# Altium PCB PCB_FT232H.PcbDoc
Units mil, origin at the board's own origin, x right, y up, seen from the top; angles counter-clockwise.
Board outline 1182.5 x 536.5 mil, 4 copper layers (Top Layer, GND, PWR, Bottom Layer), stack 39.383 mil thick; 38 components, 29 nets, 136 pads, 152 vias.
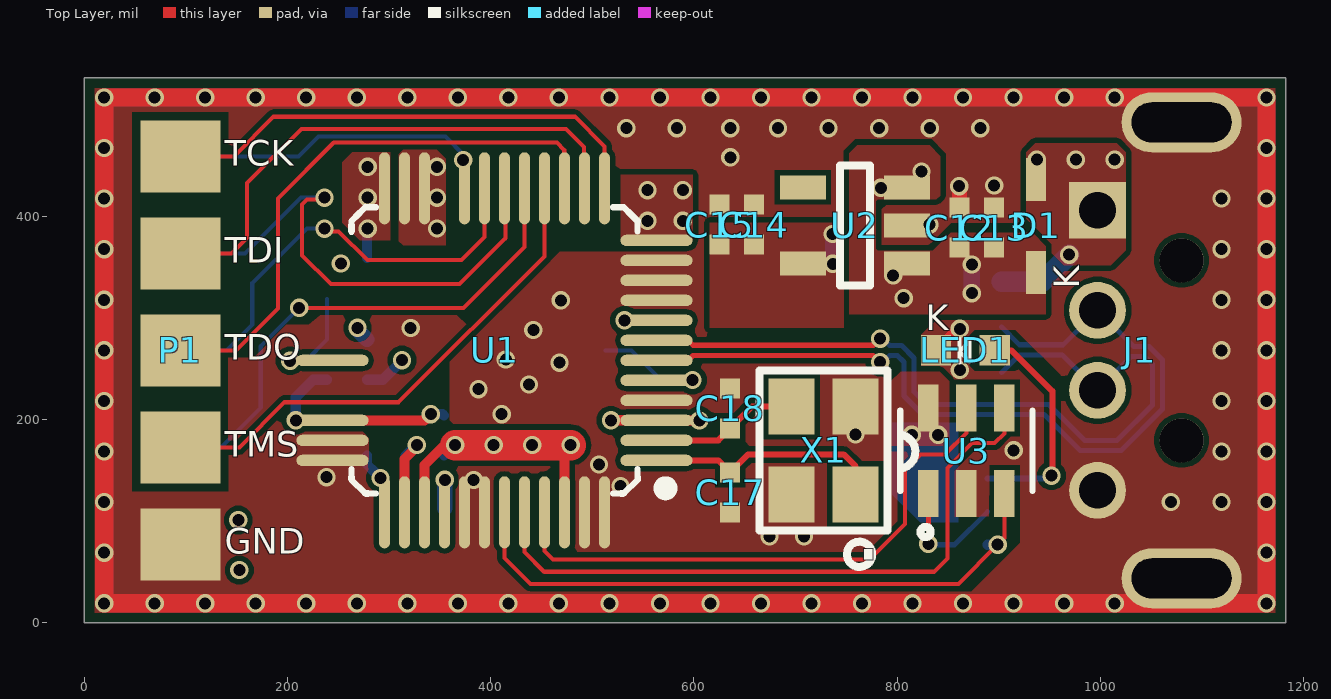
[diagram p0: Top Layer view]
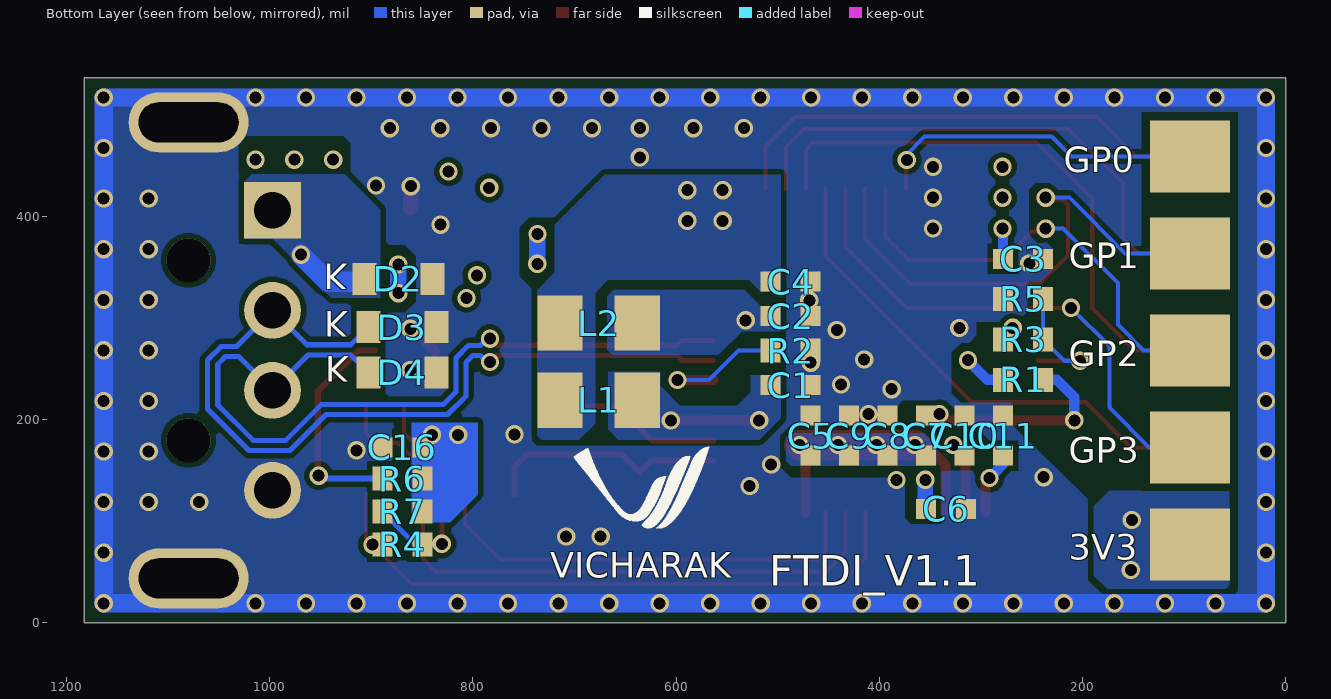
[diagram p1: Bottom Layer view, seen from below]
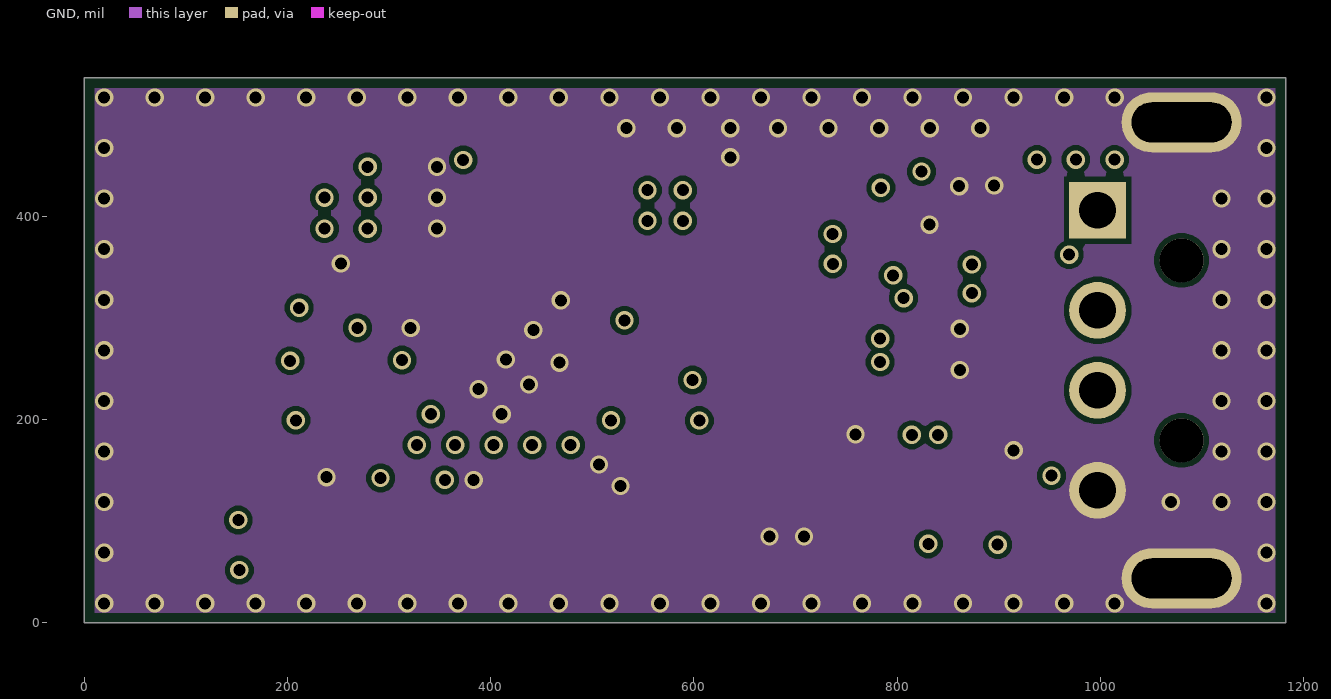
[diagram p2: GND]
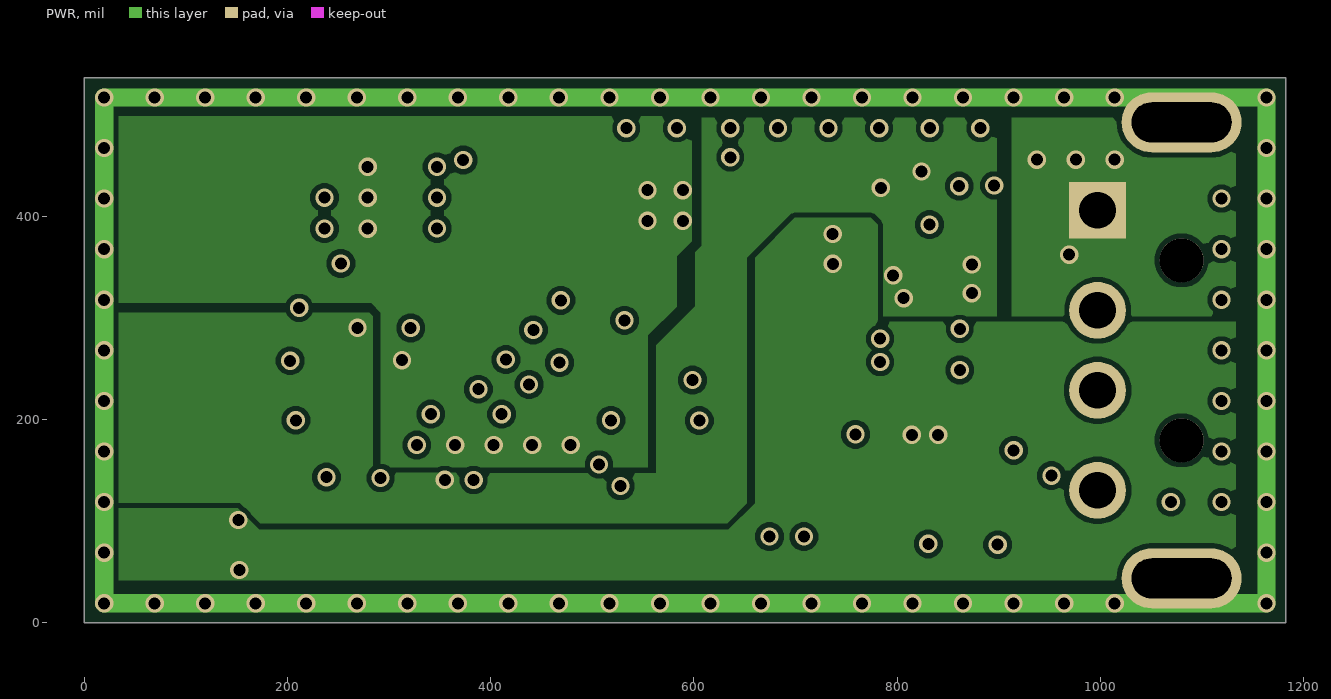
[diagram p3: PWR]
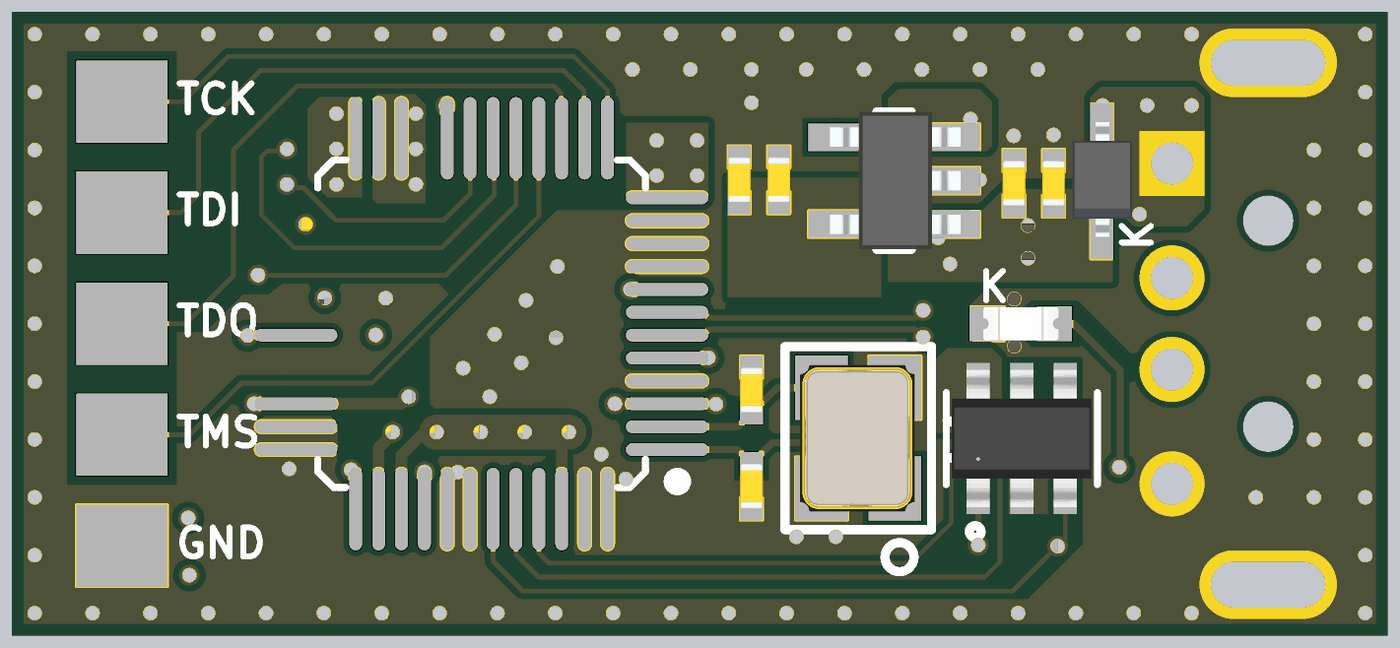
[diagram p4: 3D render of the assembled board from above, using the file's embedded part models]
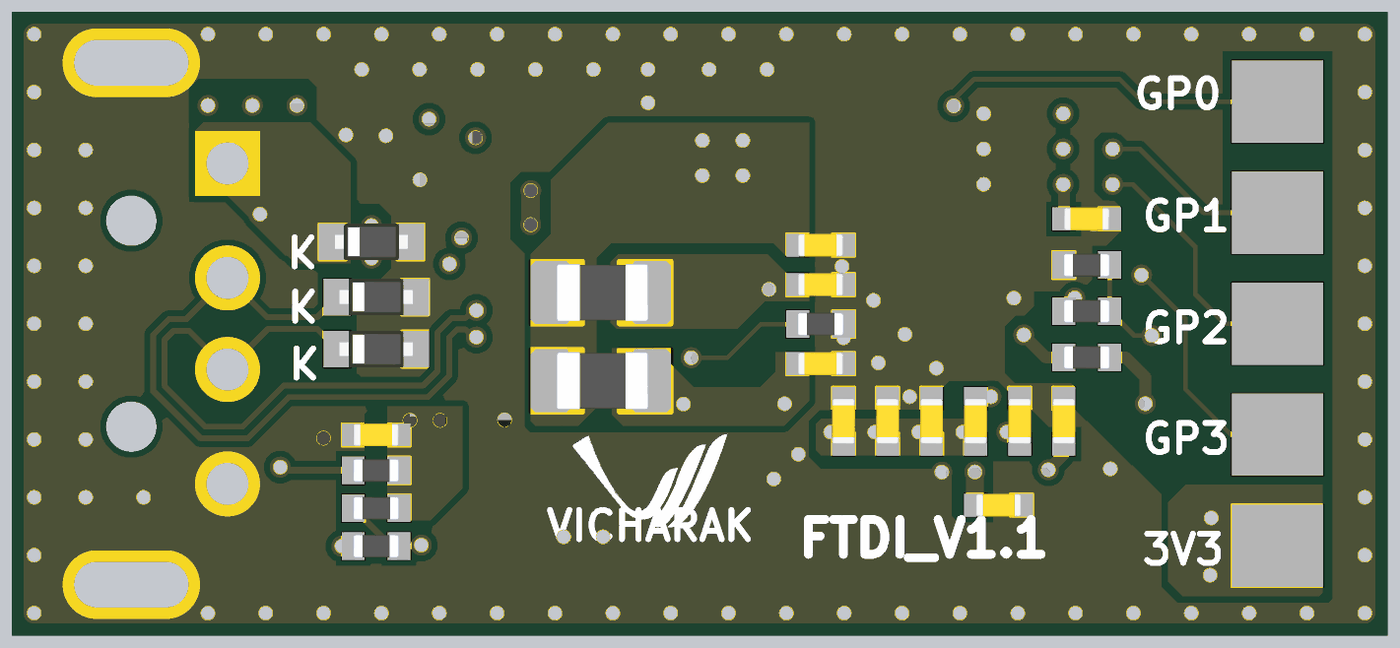
[diagram p5: 3D render of the assembled board from below, using the file's embedded part models]

## Layer stack, top to bottom
Top Solder: solder mask 1, SM-001, Dk 4
Top Layer: signal copper 1.4
Dielectric 2: prepreg 3.9134, PP-006, Dk 4.1
GND: signal copper 0.5984
Dielectric 1: dielectric 27.5591, FR-4, Dk 4.8
PWR: signal copper 0.5984
Dielectric 3: prepreg 3.9134, PP-006, Dk 4.1
Bottom Layer: signal copper 1.4
Bottom Solder: solder mask 1, SM-001, Dk 4

## Board outline
0,0 1182.5,0 1182.5,536.5 0,536.5

## Design rules (kind name [scope] priority, off if disabled: settings)
BoardOutlineClearance [All] p1: gap=10 ignorepadtopadclearanceinfootprint=FALSE except(0: Arc-SplitContinuation Track-SplitContinuation SMDPad-SplitContinuation THPad-SplitContinuation Via-SplitContinuation Fill-SplitContinuation Poly-SplitContinuation Region-SplitContinuation Text-SplitContinuation)
Clearance [All] p1: gap=5 ignorepadtopadclearanceinfootprint=FALSE
ComponentClearance [All] p1: gap=6 collisioncheckmode=3 verticalgap=10 showdistances=FALSE
DiffPairsRouting [All] p1: maxlimit=5 minlimit=5 mostfreqgap=5 toplayer_minwidth=4 toplayer_maxwidth=5 toplayer_prefwidth=5 midlayer1_minwidth=4 midlayer1_maxwidth=5 midlayer1_prefwidth=5 midlayer2_minwidth=4 midlayer2_maxwidth=5 midlayer2_prefwidth=5 bottomlayer_minwidth=4 bottomlayer_maxwidth=5 bottomlayer_prefwidth=5 maxuncoupledlength=500
HoleSize [All] p1: absolutevalues=TRUE maxlimit=100 minlimit=0.04 maxpercent=80.000 minpercent=20.000
MinimumSolderMaskSliver [All] p1: minsoldermaskwidth=0
NetAntennae [All] p1: netantennaetolerance=10
PolygonConnect [All] p1: connectstyle=Direct reliefconductorwidth=10 reliefentries=4 polygonreliefangle="90 Angle" airgapwidth=10
RoutingVias [All] p1: holewidth=11.81 width=17.99 viastyle="Through Hole" minholewidth=11.81 minwidth=17.99 maxholewidth=11.81 maxwidth=17.99
SilkToSilkClearance [All] p1: silktosilkclearance=0
SilkToSolderMaskClearance [IsPad] p1: minsilkscreentomaskgap=0 clearancetoexposedcopper=TRUE
SolderMaskExpansion [All] p1: expansion=1 istentingtop=FALSE
UnRoutedNet [All] p1: checkbadconnections=TRUE
Width [All] p1: maxlimit=200 minlimit=4 preferedwidth=6 midlayer1_prefwidth=5 midlayer2_prefwidth=5 minimp=50.000000 maximp=50.000000 favimp=50.000000
22 further rules are at their usual default settings.

## Classes and differential pairs
net class DIFF90: USB_N USB_P
differential pair USB: +USB_P -USB_N

## Components (designator, comment, footprint, x,y, rotation, side; value= is the part's Value field where it differs from the comment)
C1 "" CAPC0402 487.32,233.96 r0 bottom value=100nF
C2 "" CAPC0402 487.32,301.92 r0 bottom value=100nF
C3 "" CAPC0402 258.59,358.43 r180 bottom value=100nF
C4 "" CAPC0402 487.32,335.89 r180 bottom value=100nF
C5 "" CAPC0402 467.64,184.4 r90 bottom value=100nF
C6 "" CAPC0402 334.34,112.25 r0 bottom value=100nF
C7 "" CAPC0402 354.02,184.4 r270 bottom value=10nF
C8 "" CAPC0402 391.89,184.4 r270 bottom value=4.7uF
C9 "" CAPC0402 429.77,184.4 r270 bottom value=100nF
C10 "" CAPC0402 316.15,184.4 r270 bottom value=100nF
C11 "" CAPC0402 278.28,184.4 r270 bottom value=100nF
C12 "" CAPC0402 861.43,389.04 r270 top value=4.7uF
C13 "" CAPC0402 895.48,389.04 r270 top value=100nF
C14 "" CAPC0402 659.25,392.04 r270 top value=100nF
C15 "" CAPC0402 625.2,392.04 r270 top value=4.7uF
C16 "" CAPC0402 869.45,172.7 r180 bottom value=100nF
C17 "" CAPC0402 635.73,128.54 r90 top value=22pF
C18 "" CAPC0402 635.73,211.21 r270 top value=22pF
D1 "" BAT760-7 936.91,390.7 r90 top
D2 "" SOD523 873.48,338.66 r90 bottom
D3 "" SOD523 869.45,291.19 r90 bottom
D4 "" SOD523 869.45,246.44 r90 bottom
J1 "" MOLEX_48037-0001_0 1038.61,268.3 r90 top locked
L1 "" "FERRITE BEAD 600R 0.5A" 676.2,219.21 r180 bottom
L2 "" "FERRITE BEAD 600R 0.5A" 676.2,295.02 r180 bottom
LED1 "" LED_0603 867.27,268.3 r180 top
P1 "" "10 PIN SMD" 94.48,268.3 r90 top
R1 "" RESC0402 258.59,239.33 r180 bottom value=10k
R2 "" RESC0402 487.32,267.94 r180 bottom value=12k
R3 "" RESC0402 258.59,279.03 r0 bottom value=10K
R4 "" RESC0402 869.45,76.98 r180 bottom value=2K
R5 "" RESC0402 258.59,318.73 r180 bottom value=20K
R6 "" RESC0402 869.45,142.11 r180 bottom value=2K
R7 "" RESC0402 869.45,109.55 r0 bottom value=10k
U1 "" "LQFP-48_7X7X05P__  FT232HL-REEL" 403.72,268.3 r180 top locked
U2 "" SOT25 758.35,391.31 r180 top
U3 "" SOT-23-6 868.07,169.51 r90 top
X1 "" CRYSTAL_3225 727.54,169.88 r90 top

## Footprints (in the part's own frame and the unit in brackets; to place one, negate y for a bottom-side part, rotate by r counter-clockwise, add the part's x,y. Pads: shape width x height; smd on the part's side, far side on the other; paste and mask are expansions set on the pad)
"10 PIN SMD" [mm]
  rect 1.8x2 smd: 1(-4.85,0) 2(-2.425,0) 3(0,0) 4(2.425,0) 5(4.85,0)
  rect 1.8x2 smd far side: 6(4.85,0) 7(2.425,0) 8(0,0) 9(-2.425,0) 10(-4.85,0)
BAT760-7 [mm]
  rect 1.075x0.5 smd: 1(-1.162,0) 2(1.162,0)
  body extent -1.21,-0.66 1.29,0.64, height 1.2
CAPC0402 [mm]
  rect 0.5x0.5 smd: 1(-0.5,0) 2(0.5,0)
  body extent -0.5,-0.25 0.5,0.25, height 0.56
CRYSTAL_3225 [mm] "3225 pack"
  rect 1.4x1.15 smd: 1(-1.1,-0.8) 2(1.1,-0.8) 3(1.1,0.8) 4(-1.1,0.8)
  silkscreen extent -2.92,-1.6 2,1.6, body extent -1.6,-1.23 1.6,1.27, height 0.6
"FERRITE BEAD 600R 0.5A" [mil] "Ferrite Beads 600 OHM 25% 0.5A"
  rect 44.59x54.21 smd paste-3937.01 mask+2: 1(-38.05,0) 2(38.04,0)
  body extent -38,-25 41,25, height 41
LED_0603 [mil]
  rect 30x30 smd: A(-29.02,0) K(29.02,0)
  silkscreen extent -4,-11 6,12, body extent -32,-14 32,14, height 25
"LQFP-48_7X7X05P__  FT232HL-REEL" [mm]
  oval 1.8x0.28 smd: 1(-4.05,2.75) 2(-4.05,2.25) 3(-4.05,1.75) 4(-4.05,1.25) 5(-4.05,0.75) 6(-4.05,0.25) 7(-4.05,-0.25) 8(-4.05,-0.75) 9(-4.05,-1.25) 10(-4.05,-1.75) 11(-4.05,-2.25) 12(-4.05,-2.75) 31(4.05,0.25) 34(4.05,1.75) 35(4.05,2.25) 36(4.05,2.75)
  oval 0.28x1.8 smd: 13(-2.75,-4.05) 14(-2.25,-4.05) 15(-1.75,-4.05) 16(-1.25,-4.05) 17(-0.75,-4.05) 18(-0.25,-4.05) 19(0.25,-4.05) 20(0.75,-4.05) 22(1.75,-4.05) 23(2.25,-4.05) 24(2.75,-4.05) 37(2.75,4.05) 38(2.25,4.05) 39(1.75,4.05) 40(1.25,4.05) 41(0.75,4.05) 42(0.25,4.05) 43(-0.25,4.05) 44(-0.75,4.05) 45(-1.25,4.05) 46(-1.75,4.05) 47(-2.25,4.05) 48(-2.75,4.05)
  silkscreen extent -4.42,-3.58 3.58,3.6, body extent -4.5,-4.5 4.5,4.5, height 1.45
MOLEX_48037-0001_0 [mm]
  rect 1.42x1.42 hole 0.92 paste-1000 mask+0: 1(3.5,1.05)
  round 1.42 hole 0.92 paste-1000 mask+0: 2(1,1.05) 3(-1,1.05) 4(-3.5,1.05)
  oval 1.5x3 hole 1 slot 2.5 at 90 deg paste-1000 mask+0: 5(-5.7,-1.05) 6(5.7,-1.05)
  round 1.1 hole 1.1 unplated paste-1000 mask+0: ""(-2.25,-1.05) ""(2.25,-1.05)
  body extent -6.3,-18.76 6.3,1.16, height 3
RESC0402 [mm]
  rect 0.5x0.6 smd: 1(0.5,0) 2(-0.5,0)
  body extent -0.5,-0.25 0.5,0.25, height 0.4
SOD523 [mm]
  rect 0.8x0.6 smd: 1(0,0.85) 2(0,-0.85)
  body extent -0.4,-0.8 0.4,0.8, height 0.7
SOT25 [mm]
  rect 1.15x0.6 smd: 1(-1.3,0.95) 2(-1.3,0) 3(-1.3,-0.95) 4(1.3,-0.95) 5(1.3,0.95)
  silkscreen extent -0.38,-1.5 0.38,1.5, body extent -1.45,-1.5 1.4,1.5, height 1.3
SOT-23-6 [mil]
  rect 46x20 smd paste+0 mask+0: 1(-42,37.4) 2(-42,0) 3(-42,-37.4) 4(42,-37.4) 5(42,0) 6(42,37.4)
  silkscreen extent -85,-65 40,65, body extent -59,-60 59,60, height 57

## Part data
C1 C2 C3 C4 C5 C6 C9 C10 C11 C13 C14 C16: library part Capacitor, "CAP CER 100nF 50V X7R 0402", Case/Package=0402, Dielectric=X7R, Voltage=50V
C7: library part Capacitor, "CAP CER 10nF 25V X7R 0402", Case/Package=0402, Dielectric=X7R, Voltage=25V
C8 C12 C15: library part Capacitor, "CAP CER 4.7uF 16V X5R 0402", Case/Package=0402, Dielectric=X5R, Voltage=16V
C17 C18: library part Capacitor, "CAP CER 22pF 50V 0402", Case/Package=0402, Voltage=50V
D1: library part B5819WS, "DIODE SCHOTTKY 40V 1A SOD323", Case/Package=SOD-323, Manufacturer Part Number=B5819WS
D2 D3 D4: library part ESD9X5.0ST5G, "12.3V Clamp 8.7A (8/20µs) Ipp Tvs Diode Surface Mount SOD-523", Case/Package=SOD-523, Manufacturer Part Number=LESD5Z5.0CT1G, ComponentLink1Description=https://datasheet.ciiva.com/30478/0900766b812769b5-30478676.pdf?src-supplier=RSComponents, ComponentLink1URL=https://datasheet.ciiva.com/30478/0900766b812769b5-30478676.pdf?src-supplier=RSComponents, ComponentLink2Description=https://datasheet.ciiva.com/25958/esd9x3-3st5g-d-25958458.pdf?src-supplier=Avnet+Europe, ComponentLink2URL=https://datasheet.ciiva.com/25958/esd9x3-3st5g-d-25958458.pdf?src-supplier=Avnet+Europe, ComponentLink3Description=https://datasheet.ciiva.com/1219/1748783-1219324.pdf?src-supplier=Newark, ComponentLink3URL=https://datasheet.ciiva.com/1219/1748783-1219324.pdf?src-supplier=Newark, ComponentLink4Description=https://datasheet.ciiva.com/3304/esd9x3-3st5g-d-3304012.pdf?src-supplier=Avnet, ComponentLink4URL=https://datasheet.ciiva.com/3304/esd9x3-3st5g-d-3304012.pdf?src-supplier=Avnet, ComponentLink5Description=https://datasheet.ciiva.com/339/esd9x3-3st5g-d-339709.pdf?src-supplier=Digi-Key, ComponentLink5URL=https://datasheet.ciiva.com/339/esd9x3-3st5g-d-339709.pdf?src-supplier=Digi-Key, ComponentLink6Description=https://datasheet.ciiva.com/16215/esd9x3-3st5g-d-16215149.pdf?src-supplier=Future+Electronics, ComponentLink6URL=https://datasheet.ciiva.com/16215/esd9x3-3st5g-d-16215149.pdf?src-supplier=Future+Electronics, ComponentLink7Description=https://datasheet.ciiva.com/339/esd9x3-3st5g-d-339710.pdf?src-supplier=Digi-Key, ComponentLink7URL=https://datasheet.ciiva.com/339/esd9x3-3st5g-d-339710.pdf?src-supplier=Digi-Key, ComponentLink8Description=https://datasheet.ciiva.com/339/esd9x3-3st5g-d-339711.pdf?src-supplier=Digi-Key, ComponentLink8URL=https://datasheet.ciiva.com/339/esd9x3-3st5g-d-339711.pdf?src-supplier=Digi-Key
J1: library part "USB MALE", "USB A-type Plug Male PCB R/A", Case/Package=TH, Manufacturer Part Number="USB Type A male"
L1 L2: library part "Ferrite Bead", "Ferrite Beads 600 OHM 25% 2A", Case/Package=0805, Manufacturer Part Number=UPZ2012E601-2R0TF
LED1: library part LED, "RED LED 0603", Case/Package=0603
P1: library part "Header 10", "Header, 10-Pin", Case/Package="Re-released for DXP Platform.", Manufacturer Part Number=17-Jul-2002
R1 R3: library part Res1, "Thick Film Resistor -  10Kohm, 1%, 0402", Case/Package=0402
R2: library part Res1, "Thick Film Resistor -  12Kohm, 1%, 0402", Case/Package=0402, ComponentLink1Description=http://uk.rs-online.com/webdocs/0d98/0900766b80d98824.pdf?src-supplier=RSComponents, ComponentLink1URL=http://uk.rs-online.com/webdocs/0d98/0900766b80d98824.pdf?src-supplier=RSComponents, ComponentLink2Description=http://www.vishay.com/docs/20035/dcrcwe3.pdf?src-supplier=Digi-Key, ComponentLink2URL=http://www.vishay.com/docs/20035/dcrcwe3.pdf?src-supplier=Digi-Key, ComponentLink3Description=http://www.farnell.com/datasheets/2045673.pdf?src-supplier=Element14, ComponentLink3URL=http://www.farnell.com/datasheets/2045673.pdf?src-supplier=Element14, ComponentLink4Description=http://www.vishay.com/docs/20035/dcrcwe3.pdf?src-supplier=Avnet, ComponentLink4URL=http://www.vishay.com/docs/20035/dcrcwe3.pdf?src-supplier=Avnet, ComponentLink5Description=https://www.distrelec.biz/Web/Downloads/a_/en/flD-CRCW-e3_data_en.pdf?mime=application%2Fpdf&src-supplier=Distrelec, ComponentLink5URL=https://www.distrelec.biz/Web/Downloads/a_/en/flD-CRCW-e3_data_en.pdf?mime=application%2Fpdf&src-supplier=Distrelec, ComponentLink6Description=http://www.vishay.com/docs/20035/dcrcwe3.pdf?src-supplier=Mouser, ComponentLink6URL=http://www.vishay.com/docs/20035/dcrcwe3.pdf?src-supplier=Mouser, ComponentLink7Description=http://www.farnell.com/datasheets/2111203.pdf?src-supplier=Element14, ComponentLink7URL=http://www.farnell.com/datasheets/2111203.pdf?src-supplier=Element14, ComponentLink8Description=http://www.vishay.com/docs/20035/dcrcwe3.pdf?src-supplier=Future+Electronics, ComponentLink8URL=http://www.vishay.com/docs/20035/dcrcwe3.pdf?src-supplier=Future+Electronics, ComponentLink9Description=https://www.te.com/commerce/DocumentDelivery/DDEController?Action=srchrtrv&amp;DocNm=1773204-3&amp;DocType=DS&amp;DocLang=English&src-supplier=Digi-Key, ComponentLink9URL=https://www.te.com/commerce/DocumentDelivery/DDEController?Action=srchrtrv&amp;DocNm=1773204-3&amp;DocType=DS&amp;DocLang=English&src-supplier=Digi-Key, ComponentLink10Description=https://4donline.ihs.com/images/VipMasterIC/IC/TYEL/TYEL-S-A0004929575/TYEL-S-A0004929575-1.pdf?hkey=52A5661711E402568146F3353EA87419&src-supplier=Farnell, ComponentLink10URL=https://4donline.ihs.com/images/VipMasterIC/IC/TYEL/TYEL-S-A0004929575/TYEL-S-A0004929575-1.pdf?hkey=52A5661711E402568146F3353EA87419&src-supplier=Farnell, ComponentLink11Description=https://4donline.ihs.com/images/VipMasterIC/IC/TYEL/TYEL-S-A0004929575/TYEL-S-A0004929575-1.pdf?hkey=52A5661711E402568146F3353EA87419&src-supplier=Newark, ComponentLink11URL=https://4donline.ihs.com/images/VipMasterIC/IC/TYEL/TYEL-S-A0004929575/TYEL-S-A0004929575-1.pdf?hkey=52A5661711E402568146F3353EA87419&src-supplier=Newark
R4 R6: library part Res1, "Thick Film Resistor -  2Kohm, 1%, 0402", Case/Package=0402
R5: library part Res1, "Thick Film Resistor -  20Kohm, 1%, 0402", Case/Package=0402
R7: library part Res, "Thick Film Resistor -  10Kohm, 1%, 0402", Case/Package=0402
U1: library part FT232HL, "USB Interface IC USB HS to UART/FIFO SPI/JTAG/I2C LQFP-48", Case/Package=LQFP-48_7x7x05P, Manufacturer Part Number=FT232HL-REEL
U2: library part LDO_5V_3V, "LDO Voltage Regulators 600mA CMOS LDO 50mA 3.3V 250mV", Case/Package=SOT25, Manufacturer Part Number=AP2112K-3.3TRG1, ComponentLink1Description=http://www.diodes.com/datasheets/AP2112.pdf?src-supplier=Avnet, ComponentLink1URL=http://www.diodes.com/datasheets/AP2112.pdf?src-supplier=Avnet, ComponentLink2Description=https://www.diodes.com/assets/Datasheets/AP2112.pdf?src-supplier=Digi-Key, ComponentLink2URL=https://www.diodes.com/assets/Datasheets/AP2112.pdf?src-supplier=Digi-Key
U3: library part 93LC56BT-I/OT, "MICROCHIP - 93LC56BT-I/OT. - 2K, 128 X 16, SERIAL EE, IND ROHS COMPLIANT: YES", Case/Package=SOT-23-6, Frequency=2MHz, Manufacturer=Microchip, Max Operating Temperature=85°C, Max Supply Voltage=5.5V, Min Operating Temperature=-40°C, Min Supply Voltage=2.5V, Nominal Supply Current=2mA, Package Quantity=3000, Supplier Part Number 1=93LC56BT-I/OTCT-ND, Access Time=250ns, Category=EEPROM, ComponentLink1Description=https://datasheet.ciiva.com/48496/jp013939-48496476.pdf?src-supplier=Avnet, ComponentLink1URL=https://datasheet.ciiva.com/48496/jp013939-48496476.pdf?src-supplier=Avnet, ComponentLink2Description=https://datasheet.ciiva.com/16216/filehandler-aspxddocname-en013939-16216574.pdf?src-supplier=Future+Electronics, ComponentLink2URL=https://datasheet.ciiva.com/16216/filehandler-aspxddocname-en013939-16216574.pdf?src-supplier=Future+Electronics, ComponentLink3Description=https://datasheet.ciiva.com/3185/jp013939-3185519.pdf?src-supplier=Avnet, ComponentLink3URL=https://datasheet.ciiva.com/3185/jp013939-3185519.pdf?src-supplier=Avnet, ComponentLink4Description=https://datasheet.ciiva.com/16622/jp013939-16622127.pdf?src-supplier=Avnet+Europe, ComponentLink4URL=https://datasheet.ciiva.com/16622/jp013939-16622127.pdf?src-supplier=Avnet+Europe, Contact Plating=Tin,Matte, Density=2Kb, Height=1.3mm, Interface=Serial, Lead Free="Lead Free", Length=3.1mm, Manufacturer Part Number=93LC56BT-I/OT, Max Frequency=2MHz, Memory Size=2Kb, Memory Type=EEPROM, Mount="Surface Mount", Number of Pins=6, Packaging="Tape and Reel", Pricing 1="1=0.23000, 25=0.22040, 100=0.21000 (USD)", Radiation Hardening=No, REACH SVHC="No SVHC", RoHS=Yes, Stock 1=10933, Supplier 1=Digi-Key, Width=1.8mm
X1: library part CRYSTAL_1_1, "CRYSTAL 12.0000MHZ 10PF SMD", Case/Package=SMD-3225, Frequency=12MHz, Manufacturer Part Number=ECS-120-10-33B-CKM-TR

## Via types
v1: diameter 17.99, hole 11.81, Top Layer to Bottom Layer, tented both sides, 152 vias

## Nets (pads, with @x,y where several pads share a name; then routed paths per layer and width w, separated by ;. In a path a pad name is that pad's centre, name@x,y a point inside that pad or via, vN(x,y) a via of type N, cw(c..) or ccw(c..) an arc to the next point about the centre after c; other vN are vias at no path point)
3V3: C14.2 C15.2 C16.2 P1.10 R6.1 R7.2 U2.5 U3.6 | length 29.4
  Bottom Layer w16: v1(736.51,382.78) 736.75,382.54 v1@736.75,353.48
  other v1: 152.5,52 151.5,101.22 814.48,185.15 840.4,185.15 736.63,353.48
GND: C1.1 C2.1 C3.2 C4.2 C5.2 C6.1 C8.1 C9.1 C10.1 C11.1 C12.1 C13.1 C14.1 C15.1 C16.1 C17.1 C18.1 D2.2 D3.2 D4.2 J1.4 J1.5 J1.6 LED1.K P1.1 R2.1 R5.2 U1.4 U1.9 U1.10 U1.11 U1.22 U1.23 U1.35 U1.36 U1.41 U1.42 U1.47 U1.48 U2.2 U3.2 X1.2 X1.4 | length 9908.3
  Top Layer w10: C18.1 C18.1@635.73,230.99 ; LED1.K@837.65,267.1 837.05,267.1 LED1.K 859.46,289.51 v1(861.64,289.51)
  Top Layer w15: v1(861.1,429.93) 861.27,429.77 861.27,408.89 C12.1
  Top Layer w18: v1@1163.29,19.37 v1(1014.09,19.37) v1(964.36,19.37) v1(914.63,19.37) v1(864.9,19.37) v1(815.17,19.37) v1(765.44,19.37) v1(715.71,19.37) v1(665.98,19.37) v1(616.25,19.37) v1(566.52,19.37) v1(516.79,19.37) v1(467.06,19.37) v1(417.33,19.37) v1(367.6,19.37) v1(317.87,19.37) v1(268.13,19.37) v1(218.4,19.37) v1(168.67,19.37) v1(118.94,19.37) v1(69.21,19.37) v1(19.48,19.37) v1(19.48,69.15) v1(19.48,118.94) v1(19.48,168.73) v1(19.48,218.52) v1(19.48,268.3) v1(19.48,318.09) v1(19.48,367.88) v1(19.48,417.66) v1(19.48,467.45) v1(19.48,517.24) v1(69.21,517.24) v1(118.94,517.24) v1(168.67,517.24) v1(218.4,517.24) v1(268.13,517.24) v1(317.87,517.24) v1(367.6,517.24) v1(417.33,517.24) v1(467.06,517.24) v1(516.79,517.24) v1(566.52,517.24) v1(616.25,517.24) v1(665.98,517.24) v1(715.71,517.24) v1(765.44,517.24) v1(815.17,517.24) v1(864.9,517.24) v1(914.63,517.24) v1(964.36,517.24) v1(1014.09,517.24) v1@1163.29,517.24 ; v1(1163.46,19.37) v1(1163.46,69.15) v1(1163.46,118.94) v1(1163.46,168.73) v1(1163.46,218.52) v1(1163.46,268.3) v1(1163.46,318.09) v1(1163.46,367.88) v1(1163.46,417.66) v1(1163.46,467.45) v1(1163.46,517.24)
  PWR w18: v1@1163.29,19.37 v1(1014.09,19.37) v1(964.36,19.37) v1(914.63,19.37) v1(864.9,19.37) v1(815.17,19.37) v1(765.44,19.37) v1(715.71,19.37) v1(665.98,19.37) v1(616.25,19.37) v1(566.52,19.37) v1(516.79,19.37) v1(467.06,19.37) v1(417.33,19.37) v1(367.6,19.37) v1(317.87,19.37) v1(268.13,19.37) v1(218.4,19.37) v1(168.67,19.37) v1(118.94,19.37) v1(69.21,19.37) v1(19.48,19.37) v1(19.48,69.15) v1(19.48,118.94) v1(19.48,168.73) v1(19.48,218.52) v1(19.48,268.3) v1(19.48,318.09) v1(19.48,367.88) v1(19.48,417.66) v1(19.48,467.45) v1(19.48,517.24) v1(69.21,517.24) v1(118.94,517.24) v1(168.67,517.24) v1(218.4,517.24) v1(268.13,517.24) v1(317.87,517.24) v1(367.6,517.24) v1(417.33,517.24) v1(467.06,517.24) v1(516.79,517.24) v1(566.52,517.24) v1(616.25,517.24) v1(665.98,517.24) v1(715.71,517.24) v1(765.44,517.24) v1(815.17,517.24) v1(864.9,517.24) v1(914.63,517.24) v1(964.36,517.24) v1(1014.09,517.24) v1@1163.29,517.24 ; v1(1163.46,19.37) v1(1163.46,69.15) v1(1163.46,118.94) v1(1163.46,168.73) v1(1163.46,218.52) v1(1163.46,268.3) v1(1163.46,318.09) v1(1163.46,367.88) v1(1163.46,417.66) v1(1163.46,467.45) v1(1163.46,517.24)
  Bottom Layer w10: v1@859.95,291.19 v1(861.64,289.51)
  Bottom Layer w18: v1@1163.29,19.37 v1(1014.09,19.37) v1(964.36,19.37) v1(914.63,19.37) v1(864.9,19.37) v1(815.17,19.37) v1(765.44,19.37) v1(715.71,19.37) v1(665.98,19.37) v1(616.25,19.37) v1(566.52,19.37) v1(516.79,19.37) v1(467.06,19.37) v1(417.33,19.37) v1(367.6,19.37) v1(317.87,19.37) v1(268.13,19.37) v1(218.4,19.37) v1(168.67,19.37) v1(118.94,19.37) v1(69.21,19.37) v1(19.48,19.37) v1(19.48,69.15) v1(19.48,118.94) v1(19.48,168.73) v1(19.48,218.52) v1(19.48,268.3) v1(19.48,318.09) v1(19.48,367.88) v1(19.48,417.66) v1(19.48,467.45) v1(19.48,517.24) v1(69.21,517.24) v1(118.94,517.24) v1(168.67,517.24) v1(218.4,517.24) v1(268.13,517.24) v1(317.87,517.24) v1(367.6,517.24) v1(417.33,517.24) v1(467.06,517.24) v1(516.79,517.24) v1(566.52,517.24) v1(616.25,517.24) v1(665.98,517.24) v1(715.71,517.24) v1(765.44,517.24) v1(815.17,517.24) v1(864.9,517.24) v1(914.63,517.24) v1(964.36,517.24) v1(1014.09,517.24) v1@1163.29,517.24 ; v1(1163.46,19.37) v1(1163.46,69.15) v1(1163.46,118.94) v1(1163.46,168.73) v1(1163.46,218.52) v1(1163.46,268.3) v1(1163.46,318.09) v1(1163.46,367.88) v1(1163.46,417.66) v1(1163.46,467.45) v1(1163.46,517.24)
  other v1: 674.36,84.99 708.25,84.99 1069.41,118.94 1119.2,118.94 527.68,134.81 383.16,140.64 238.25,143.48 506.5,156.02 1119.2,168.73 914.72,169.88 759.04,185.62 410.73,205.49 1119.2,218.52 387.85,230.03 437.76,234.65 861.64,248.9 467.64,256.13 414.88,259.19 1119.2,268.3 441.91,288.35 321.25,290.24 468.94,317.51 1119.2,318.09 252.41,353.79 1119.2,367.88 347.18,388.19 831.88,392.04 1119.2,417.66 347.18,418.58 895.48,430.65 347.18,448.96 635.74,458.32 533.38,486.92 583.17,486.92 635.74,486.92 682.74,486.92 732.53,486.92 782.32,486.92 832.1,486.92 881.89,486.92
GPIOL0: P1.9 U1.17 | length 513.7
  Top Layer w4: v1(211.45,310.16) 211.66,309.95 373.04,309.95 433.25,370.15 U1.17
  Bottom Layer w4: P1.9@94.51,172.86 134.62,172.86 173.64,211.88 173.64,272.36 v1(211.45,310.16)
GPIOL1: P1.7 U1.18 | length 519.7
  Top Layer w4: v1@236.35,417.77 235.47,416.89 219.35,416.89 214.29,411.83 214.29,361.85 242.72,333.43 369.34,333.43 414.57,378.65 414.57,426.75 U1.18
  Bottom Layer w4: P1.7 158.25,363.77 213.06,418.58 235.54,418.58 v1@236.35,417.77
  other v1: 236.35,418.58
GPIOL2: P1.8 U1.19 | length 442.8
  Top Layer w4: v1@236.49,388.1 239.17,385.42 250.3,385.42 278.58,357.15 371.22,357.15 393.88,379.8 U1.19
  Bottom Layer w4: P1.8 139.83,268.3 165.29,293.76 165.29,334.37 219.02,388.1 v1(236.35,388.1)
GPIOL3: P1.6 U1.20 | length 329
  Top Layer w4: U1.20@369.92,456.67 U1.20@370.94,455.65 ; U1.20@373.92,456.67 373.92,428.02 U1.20
  Bottom Layer w4: P1.6 210.98,459.25 230.33,478.6 355.38,478.6 373.92,460.06 v1@373.92,456.67
  other v1: 372.92,455.67
NetC1_2: C1.2 L1.2 U1.3 | length 91.9
  Top Layer w4: U1.3@563.12,199.46 U1.3 ; v1@607.18,199.4 v1@608.26,200.48
  Top Layer w10: v1@516.81,199.46 v1(518.31,199.46) U1.3@563.12,199.46 ; U1.3 v1@607.18,199.4
  other v1: 605.26,199.17
NetC2_2: C2.2 L2.2 U1.8
  other v1: 531.61,297.83
NetC7_1: C7.1 R1.1 U1.34 | length 209.5
  Top Layer w10: v1(208.16,199.49) 208.25,199.4 U1.34 334.89,199.4 v1(340.97,205.49)
  Bottom Layer w10: v1(208.16,199.49) 208.16,222.18 225.31,239.33 R1.1 ; v1(340.97,205.49) 352.62,205.49 C7.1
NetC10_2: C10.2 U1.38 | length 79.5
  Top Layer w10: U1.38 315.14,161.41 v1@325.49,171.76
  Bottom Layer w10: C10.2 323.19,171.76 C10.2@325.49,171.76
  other v1: 327.19,175.06
NetC11_2: C11.2 U1.37 | length 63
  Top Layer w10: v1(291.55,142.67) 295.45,138.77 U1.37
  Bottom Layer w10: C11.2 278.28,155.94 285.32,148.9 v1(291.55,142.67)
NetC17_2: C17.2 U1.1 X1.1 | length 240.5
  Top Layer w6: U1.1 623.92,160.03 C17.2 653.41,165.9 747.27,165.9 759.04,154.13 X1.1
NetC18_2: C18.2 U1.2 X1.3 | length 146.7
  Top Layer w6: U1.2 623.92,179.72 C18.2 657.38,213.18 X1.3
NetD1_2: D1.2 D2.1 J1.1 | length 77.4
  Bottom Layer w20: D2.1@902.91,335.95 942.88,335.95 v1@969.32,362.39
  other v1: 969.32,362.52 937.53,456 975.81,456 1014.09,456
NetLED1_A: LED1.A R6.2 | length 220.5
  Top Layer w6: LED1.A 912.47,268.3 952.72,228.05 952.72,145.74 v1(951.92,144.94)
  Bottom Layer w6: R6.2 949.09,142.11 v1(951.92,144.94)
NetR2_2: R2.2 U1.5 | length 133.9
  Top Layer w10: U1.5@563.44,239.04 v1@599.6,239.04
  Bottom Layer w4: R2.2@512.81,267.94 538.71,267.94 567.61,239.04 v1(598.6,239.04)
NetR3_2: R3.2 R5.1 U1.31 | length 126.6
  Top Layer w4: v1(202.58,258.05) 243.85,258.05 U1.31
  Bottom Layer w4: v1(202.58,258.05) 217.93,258.05 R3.2 R5.1
NetR4_1: R4.1 R7.1 U3.1 | length 121.9
  Top Layer w5: v1(830.67,77.9) U3.1
  Bottom Layer w5: v1(830.67,77.9) 831.59,76.98 R4.1 856.57,76.98 R7.1
NetR4_2: R4.2 U1.43 U3.3 | length 620.1
  Top Layer w4: U1.43 413.56,63.77 438.96,38.37 860.36,38.37 v1(898.97,76.98) 905.48,83.49 U3.3
  Bottom Layer w10: R4.2 v1(898.97,76.98)
NetU1_44: U1.44 U3.4 | length 652.9
  Top Layer w4: U1.44 433.25,69.78 452.67,50.37 836.24,50.37 849.37,63.5 849.37,152.63 873.85,177.11 895.93,177.11 905.48,186.65 U3.4
NetU1_45: U1.45 U3.5 | length 563.6
  Top Layer w4: U1.45 452.93,70.88 461.44,62.37 772.84,62.37 807.68,97.21 807.68,150.57 823.01,165.9 846.87,165.9 868.07,187.11 U3.5@868.07,211.14
TCK: P1.5 U1.13 | length 487
  Top Layer w4: P1.5 147.17,459.25 186.16,498.24 482.79,498.24 511.99,469.04 U1.13
TDI: P1.4 U1.14 | length 527.9
  Top Layer w4: P1.4 145.03,363.77 160.29,379.04 160.29,432.88 213.65,486.24 474.15,486.24 491.75,468.63 491.75,428.3 U1.14
TDO: P1.3 U1.15 | length 566.9
  Top Layer w4: P1.3 149.09,268.3 190.44,309.66 190.44,417.76 245.49,472.81 465.19,472.81 472.33,465.67 472.33,428.04 U1.15
TMS: P1.2 U1.16 | length 503.2
  Top Layer w4: P1.2 152.57,172.83 196.97,217.23 309.3,217.23 452.93,360.86 U1.16
USB_N: D3.1 J1.2 U1.6 | length 828.7
  Top Layer w5: U1.6 594.19,258.46 599.03,263.3 776.43,263.3 782.97,256.76 v1(783.31,256.76)
  Bottom Layer w5: v1(783.31,256.76) 786.23,256.76 792.73,263.26 800.14,263.26 806.67,256.72 806.67,223.44 824.95,205.16 944.72,205.16 980.16,169.72 1020.47,169.72 1061.23,210.48 1061.23,258.76 1047.8,272.18 1032.76,272.18 J1.2 963.41,273.81 920.29,273.81 D3.1
USB_P: D4.1 J1.3 U1.7 | length 795
  Top Layer w5: U1.7 594.19,278.14 599.03,273.3 776.86,273.3 v1(783.31,279.75)
  Bottom Layer w5: v1(783.31,279.75) 786.23,279.75 792.73,273.26 804.28,273.26 816.67,260.87 816.67,227.58 829.1,215.16 948.86,215.16 984.3,179.72 1016.33,179.72 1051.23,214.62 1051.23,254.62 1043.66,262.18 1030.52,262.18 J1.3 962.39,263.81 920.29,263.81 D4.1
VBUS: C6.2 C12.2 C13.2 D1.1 R3.1 U1.40 U2.1 U2.3 | length 72.3
  Bottom Layer w4: C6.2 C6.2@354.74,112.97
  Bottom Layer w15: v1(268.84,290.44) 268.84,288.47 R3.1 ; C6.2@354.74,112.97 v1(354.74,140.85)
  Bottom Layer w16: v1(873.48,324.6) v1(873.48,352.72)
  other v1: 806.43,319.64 796.04,342.1 783.99,428.26 823.99,444.26
VCCD: C3.1 C4.1 C5.1 C7.2 C8.2 C9.2 L1.1 L2.1 R1.2 U1.12 U1.24 U1.39 U1.46 | length 365.6
  Top Layer w10: U1.39 334.82,155.4 354.48,175.06 v1(365.07,175.06) ; U1.46 472.62,169 v1(478.68,175.06)
  Top Layer w30: v1(365.07,175.06) v1(402.94,175.06) v1(440.81,175.06) v1(478.68,175.06)
  Bottom Layer w10: C3.1@278.17,359.42 v1@278.17,386.26 ; R1.2 293.81,239.33 v1@312.67,258.19 ; C7.2 v1@364.37,175.06 ; C5.1 v1@477.98,175.06
  other v1: 312.67,258.67 278.83,388.1 554.22,395.73 589,395.73 278.83,418.58 554.22,425.91 589,425.91 278.83,448.96
pads on no net: J1. U2.4

## Polygon pours and split planes (outlines as drawn)
NetD1_2 on Top Layer "NETD1_2_L01_P003" (solid, pour order 3): 934.28,390.7 927.07,397.91 927.07,399.61 927.07,463.09 935.98,472 1016.34,472 1025.22,463.12 1025.22,366.85 1010.37,352 952.28,352 952.28,372.7
VBUS on Top Layer "VBUS_L01_P027" (solid, pour order 27): 838.7,416.9 780.72,416.9 780.72,366.45 835.1,366.45 852.65,384 934.95,384 946.5,372.45 946.5,304 753.01,304 753.01,462.11 760.82,469.92 832.11,469.92 842.5,459.53 842.5,420.69
GND on Top Layer "GND_L01_P057" (solid, remove dead copper, pour order 57): 309.63,459.96 312.87,463.2 346.97,463.2 357.16,453 357.16,372.94 355.88,371.66 313.76,371.66 309.63,375.79
GND on Top Layer "GND_L01_P058" (solid, remove dead copper, pour order 58): -4.08,538.15 1177.02,538.15 1177.02,3.15 -4.08,3.15
VCCD on Top Layer "VCCD_L01_P039" (solid, pour order 39): 300.96,463.19 263.78,463.19 253.98,453.39 253.98,394.04 271.21,376.81 300.96,376.81
3V3 on Top Layer "3V3_L01_P036" (solid, pour order 36): 615.36,290.7 615.36,393.78 738.26,393.78 747.27,384.77 747.27,290.7
VCCD on Top Layer "VCCD_L01_P008" (solid, pour order 8): 527.74,406.22 527.74,441.26 598.6,441.26 598.6,376.57 527.74,376.57
3V3 on Top Layer "3V3_L01_P006" (solid, pour order 6): 845.15,174.28 851.05,180.18 851.05,238.07 841.77,247.36 803.36,247.36 794.18,238.18 794.18,174.28
GND on Top Layer "GND_L01_P062" (solid, pour order 62): 890.48,125.55 890.48,155.51 920.43,155.51 923.39,158.46 923.39,182.27 910.52,182.27 898.76,170.51 877.35,170.51 856.51,149.67 856.51,104.9 856.9,104.51 881.56,104.51 881.95,104.9 881.95,117.03
GND on Top Layer "GND_L01_P061" (solid, pour order 61): 55.11,10.4 55.11,112.79 133.85,112.79 133.85,10.4
GND on Top Layer "GND_L01_P059" (solid, pour order 59): 609.63,486.92 609.63,407.62 615.36,401.89 669.09,401.89 676.81,409.61 676.81,455.32 698.2,476.71 698.2,498.9 621.61,498.9
GND on Top Layer "GND_L01_P048" (solid, pour order 48): 212.07,185.23 208.84,182.01 208.84,148.86 223.56,134.14 263.96,134.14 279.7,149.89 279.7,182.01 276.47,185.23 274.19,185.23
GND on Top Layer "GND_L01_P046" (solid, pour order 46): 368.68,147.72 373.32,152.36 395.65,152.36 399.39,148.62 399.39,67.4 395.76,63.77 371.53,63.77 368.68,66.62
GND on Top Layer "GND_L01_P045" (solid, pour order 45): 736.4,240.74 736.4,185.62 746.2,175.82 771.88,175.82 781.68,185.62 781.68,240.74
GND on Top Layer "GND_L01_P044" (solid, pour order 44): 662.18,126.57 633.76,126.57 625.89,118.69 625.89,92.81 647.82,70.88 732.68,70.88 732.75,70.85 732.75,84.95 718.69,99.01 718.69,154.13 662.18,154.13
GND on Top Layer "GND_L01_P043" (solid, pour order 43): 612.77,224.6 612.85,224.53 625.89,237.57 625.89,240.74 645.57,240.74 645.57,221.06 638.1,213.58 506.48,213.58 491.93,199.04 363.87,199.04 363.87,225.59 500.67,362.39 595.37,362.39 598.6,359.17 598.6,315.23 595.37,312 525.83,312 511.76,297.93 511.76,243.81 530.96,224.6
GND on Top Layer "GND_L01_P040" (solid, pour order 40): 510.67,165.54 542.51,133.71 542.51,77.71 538.22,73.42 490.02,73.42 486.79,76.65 486.79,154.52 497.81,165.54
3V3 on PWR "3V3_L03_P017" (solid, pour order 17): 794.87,41.92 1133.2,41.92 1133.2,296.44 780.72,296.44 780.72,392.04 774.19,398.57 699.24,398.57 660.22,359.56 660.22,117.95 633.93,91.66 171.91,91.66 150.78,112.79 31.84,112.79 31.84,41.92
VBUS on PWR "VBUS_L03_P019" (solid, pour order 19): 283.72,151.4 283.72,301.97 280.21,305.48 31.84,305.48 31.84,118.2 153.02,118.2 173.26,97.96 646.85,97.96 652.2,103.32 652.2,359.54 695.87,403.21 777.48,403.21 785.06,395.64 785.06,301.97 898.24,301.97 898.24,497.25 607.78,497.25 607.78,371.48 601.32,365.02 601.32,311.48 562.98,273.15 562.98,147.17 369.76,147.17 365.51,151.4
VCCD on PWR "VCCD_L03_P001" (solid, pour order 1): 282.18,315.09 291.79,305.48 291.79,285.44 291.79,153.04 554.58,153.04 554.58,283.07 582.95,311.43 582.95,360.92 597.8,375.77 597.8,498.9 31.84,498.9 31.84,315.09
NetD1_2 on PWR "NETD1_2_L03_P014" (solid, pour order 14): 1133.2,301.74 1133.2,497.25 912.89,497.25 912.89,301.74
NetD1_2 on Bottom Layer "NETD1_2_L04_P034" (solid, pour order 34): 1017.65,441.81 926.27,441.81 891.1,406.64 891.1,320.2 939.33,320.2 997.27,378.14 1025.22,378.14 1025.22,434.24
VCCD on Bottom Layer "VCCD_L04_P035" (solid, pour order 35): 516.85,326.05 528.48,337.68 667.23,337.68 679.86,325.05 679.86,196.24 695.72,180.38 732.48,180.38 736.54,184.45 736.54,328.18 719.31,345.36 719.31,392.05 670.11,441.26 497.16,441.26 497.16,337.68 497.16,326.05
NetC2_2 on Bottom Layer "NONET_L-01_P-001" (solid, pour order 32): 497.16,311.76 516.85,311.76 533.22,328.13 615.87,328.13 661.29,328.13 667.97,321.45 667.97,268.88 663.08,263.98 558.51,263.98 535.15,287.34 497.16,287.34
GND on Bottom Layer "GND_L04_P073" (solid, remove dead copper, pour order 73): 19.48,517.24 1163.46,517.24 1163.46,19.37 19.48,19.37
NetC1_2 on Bottom Layer "MM" (solid, pour order 67): 615.87,233.35 596.24,213.71 539.83,213.71 526.35,227.2 526.35,243.81 497.16,243.81 497.16,201.45 518.31,180.3 656.82,180.3 666.99,190.47 666.99,247.39 615.87,247.39
3V3 on Bottom Layer "3V3_L04_P072" (solid, pour order 72): 47.11,131.93 47.11,33.62 175.78,33.62 194.16,52 194.16,109.39 171.61,131.93 16.58,131.93
VCCD on Bottom Layer "VCCD_L04_P071" (solid, pour order 71): 344.18,175.51 355.59,186.93 486.61,186.93 492.68,180.86 492.68,160.41 487.14,154.88 344.18,154.88
GND on GND "GND_L02_P056" (solid, remove dead copper, pour order 56): 0.92,535.8 1182.02,535.8 1182.02,0.8 0.92,0.8

## Other copper
Top Layer:
  pour cut-out: 873.9,32.29 872.84,31.23 862.52,31.23 897.19,65.9 920.48,99.51 920.48,78.69 874.07,32.29
  pour cut-out: 952.28,372.7 952.28,363.94 964.54,351.67 964.49,351.62 964.49,346.59 951.9,334
  pour cut-out: 916.28,288.3 964.45,240.14 964.45,233.77
  pour cut-out: 871.27,253.32 876.28,248.3 881.28,253.3 881.28,283.3 876.28,288.3 871.27,283.29
  pour cut-out: 823.25,253.3 823.25,283.57 838.27,298.59 786.47,298.59 786.47,269.65 803.36,252.77
  pour cut-out: 362.46,195.07 362.84,195.45 363.24,195.45 359.29,199.4 359.29,256.98 357.26,254.94 357.26,188.47 359.29,190.5 359.29,195.07
  pour cut-out: 468.1,365.94 544.32,365.94 541.27,368.99 525.67,368.99 525.67,382.74 519.71,388.7 460.07,388.7 460.07,366.32 460.44,365.94 460.44,358.28
  pour cut-out: 920.1,393.22 853.27,393.22 834.67,374.62 843.27,374.62 852.65,384 852.65,389.41 916.29,389.41
  pour cut-out: 375.72,293.75 378.09,293.75 378.09,298.14 373.13,303.1 366.37,303.1
  pour cut-out: 778.89,411.12 778.89,368.28 780.72,366.45 780.72,411.12 786.5,416.9 780.72,416.9 778.89,415.07
  pour cut-out: 755.82,472.87 747.6,464.65 747.6,462.11 753.01,462.11 760.82,469.92 837.52,469.92 847.91,459.53 847.91,462.01 840,469.92 840.1,469.92 834.19,475.83 758.78,475.83
  pour cut-out: 306.37,464.01 308.33,465.97 314.16,465.97 309.63,461.43 309.63,375.79 313.76,371.66 355.61,371.66 355.61,457 346.97,465.64 351.41,465.64 363.71,453.34 363.71,364.28 317.67,364.28 313.98,367.97 306.37,375.58
  pour cut-out: 179.14,273.73 198.88,293.47 220.84,293.47 242.77,311.32 181.91,300.69 142.39,261.17 166.58,261.17
  pour cut-out: 857.13,104.51 852.13,99.51 898.34,99.51 898.34,101.64 895.48,104.51
  pour cut-out: 855.87,239.51 855.87,234.51 915.48,234.51 920.48,239.51
  pour cut-out: 278.28,160.33 279.7,161.75 279.7,183.17 274.19,188.68 274.84,189.33 283.18,189.33 283.18,153.78 279.7,150.3 279.7,149.89
  pour cut-out: 47.11,502.68 141.85,502.68 141.85,129.4 47.11,129.4
  pour cut-out: 50.11,227.87 50.11,213.26
Bottom Layer:
  pour cut-out: 311.65,275.41 304.03,283.03 304.03,275.65 295.32,266.94 295.32,222.86 264.98,222.86 194.16,152.04 194.16,121.58 268.44,194.25 268.44,213.83 271.77,217.16 319.96,217.16 328.68,225.88 328.68,266.24 320.16,274.76 319.52,275.41
  pour cut-out: 325.99,194.25 306.31,194.25 291.62,179.56 313.91,179.56 323.4,189.06 324.41,189.06 382.05,194.25 382.05,213.93 377.05,218.93 334.62,218.93 325.99,210.3
  pour cut-out: 920.74,443.8 920.74,471.91 927.73,478.9 1022.47,478.9 1030.63,470.74 1030.63,443.8
  pour cut-out: 641.33,174.89 737.32,174.89 741.54,179.11
  pour cut-out: 668.46,336.13 668.46,334.28 679.86,322.88
  pour cut-out: 58.83,33.62 55.52,36.92 55.73,37.13 55.73,136.78 55.03,137.48 47.09,137.48 47.09,31.74 50.31,28.51 180.47,28.51 194.16,42.21 194.16,121.58 178.96,136.78 141.8,136.78 141.8,129.91 173.64,129.91 188.76,114.79 188.76,46.6 175.78,33.62
  pour cut-out: 856.48,316.15 866.94,305.69 883.1,305.69 883.1,338.56 882.94,338.72 882.94,371.5 867.1,371.5 856.48,360.88
  pour cut-out: 246.33,330.54 229.07,347.8 229.07,368.27 235,374.2 244.36,374.2 252.34,382.18 252.34,426.32 246.09,432.58 232.17,432.58 223.07,423.47 223.07,374.75 218.27,369.66 218.27,330.54
  pour cut-out: 719.51,398.85 744.48,398.85 754.04,389.28 754.04,341.07 741.15,328.18 736.44,328.18 719.51,345.11
  region net 3V3: 860.13,98.96 822.58,98.96 795.13,126.41 795.13,197.17 860.12,197.17
  pour cut-out: 293.12,179.56 301.31,179.56 301.49,179.38 301.49,176.98 293.32,176.98 293.24,177.06
  pour cut-out: 293.12,295.84 293.13,295.85 304.03,295.85 304.03,263.97 296.2,256.14 293.12,256.14 293.12,262.22
  pour cut-out: 879.29,190.72 872.5,197.51 866.39,197.51 864.6,195.72 865.05,195.27 865.05,61.77 873.44,61.77 876.84,65.17 879.29,65.17 879.29,122.77
  pour cut-out: 368.87,97.41 339.18,97.41 339.18,149.88 330.99,149.88 330.99,159.46 333.17,161.63 336.65,161.63 344.18,154.1 344.18,102.41 363.87,102.41 368.68,107.22 368.68,147.98 374.45,146.23 374.45,102.99
  pour cut-out: 479.29,194.25 479.44,194.1 487.86,194.1 497.51,184.45 497.51,153.83 487.31,143.63 368.73,143.63 368.73,148.19 371.03,150.49 482.75,150.49 491.46,159.19 491.46,182.08 486.61,186.93 364.33,186.93 363.87,187.39 363.87,194.25
  pour cut-out: 47.11,502.68 141.85,502.68 141.85,129.82 47.11,129.82

## Silkscreen, mask and mechanical layers (free items; w line width, h text height)
Top Overlay:
  region: 545.75,392.69 546.75,393.36 547.41,394.35 547.64,395.52 547.41,396.69 546.75,397.68 537.08,407.35 534.75,405.56 532.85,403.09 532.8,402.97 542.42,393.36 543.41,392.69 544.58,392.46
  region: 527.74,412.23 527.54,412.23 527.54,406.11 527.74,406.11
  region: 278.67,407 279.33,408 279.56,409.17 279.33,410.34 278.67,411.33 277.67,411.99 276.5,412.23 275.33,411.99 274.34,411.33 264.67,401.66 266.47,399.33 268.93,397.44 269.05,397.39
  region: 545.75,138.26 546.75,138.92 547.41,139.92 547.64,141.09 547.64,144.48 541.53,144.48 541.53,141.09 541.76,139.92 542.42,138.92 543.41,138.26 544.58,138.03
  region: 532.11,124.61 533.1,125.27 533.76,126.27 533.99,127.44 533.76,128.61 533.1,129.6 532.11,130.26 530.94,130.5 527.54,130.5 527.54,124.38 530.94,124.38
  region: 264.02,382.28 265.02,382.94 265.68,383.93 265.91,385.1 265.91,392.32 259.8,392.32 259.8,385.1 260.03,383.93 260.69,382.94 261.68,382.28 262.85,382.04
  region: 264.02,138.26 265.02,138.92 265.68,139.92 265.91,141.09 265.91,144.48 259.8,144.48 259.8,141.09 260.03,139.92 260.69,138.92 261.68,138.26 262.85,138.03
  region: 279.9,130.5 276.5,130.5 275.33,130.26 274.34,129.6 273.68,128.61 273.44,127.44 273.68,126.27 274.34,125.27 275.33,124.61 276.5,124.38 279.9,124.38
  lines w6: 262.85,141.09 276.5,127.44 ; 276.5,409.17 286.92,409.17 ; 530.94,127.44 544.58,141.09 ; 544.58,385.1 544.58,395.52
  text "TCK" at 138.36,449.75 h25
  text "TDI" at 138.36,354.27 h25
  text "K" at 979.3,328.79 h25 r90
  text "K" at 828.25,288.3 h25
  text "TDO" at 138.36,258.8 h25
  text "TMS" at 138.36,163.33 h25
  text "GND" at 138.36,67.86 h25
  text "." at 758.66,62.38 h60
Bottom Overlay:
  drawing of 3 lines, arcs and shapes, not listed
  text "GP0" at 218.4,443.35 h25
  text "K" at 946.75,353.62 h25 r180
  text "GP1" at 213.4,349.01 h25
  text "K" at 946.31,306.94 h25 r180
  text "K" at 945.18,262.7 h25 r180
  text "GP2" at 213.4,252.87 h25
  text "GP3" at 213.4,157.64 h25
  text "3V3" at 213.4,62.4 h25
  text "VICHARAK" at 723.72,44.37 h25
  text "FTDI_V1.1" at 508.24,36.37 h30
Mechanical 2:
  lines w5: 0,0 1182.5,0 1182.5,535.8 0,535.8 0,0
Mechanical 20:
  pour cut-out: 216.09,187.63 216.09,151.99 244.27,123.81 276.47,123.81 279.69,120.6 279.69,19.37 268.13,19.37 268.13,110.15 236.75,110.15 200.23,146.67 200.23,187.63

## Dimensions
0,535.8 to 0,0 on Mechanical 2
0,535.8 to 1182.5,535.8 on Mechanical 2